# Altium PCB ADCBoard.PcbDoc (part 1 of 2)
Units mm, origin at the board's own origin, x right, y up, seen from the top; angles counter-clockwise.
Board outline 160 x 100 mm, 2 copper layers (Top Layer, Bottom Layer); 387 components, 428 nets, 1579 pads, 0 vias.
Unrouted connection lines stored in the file: 1110.
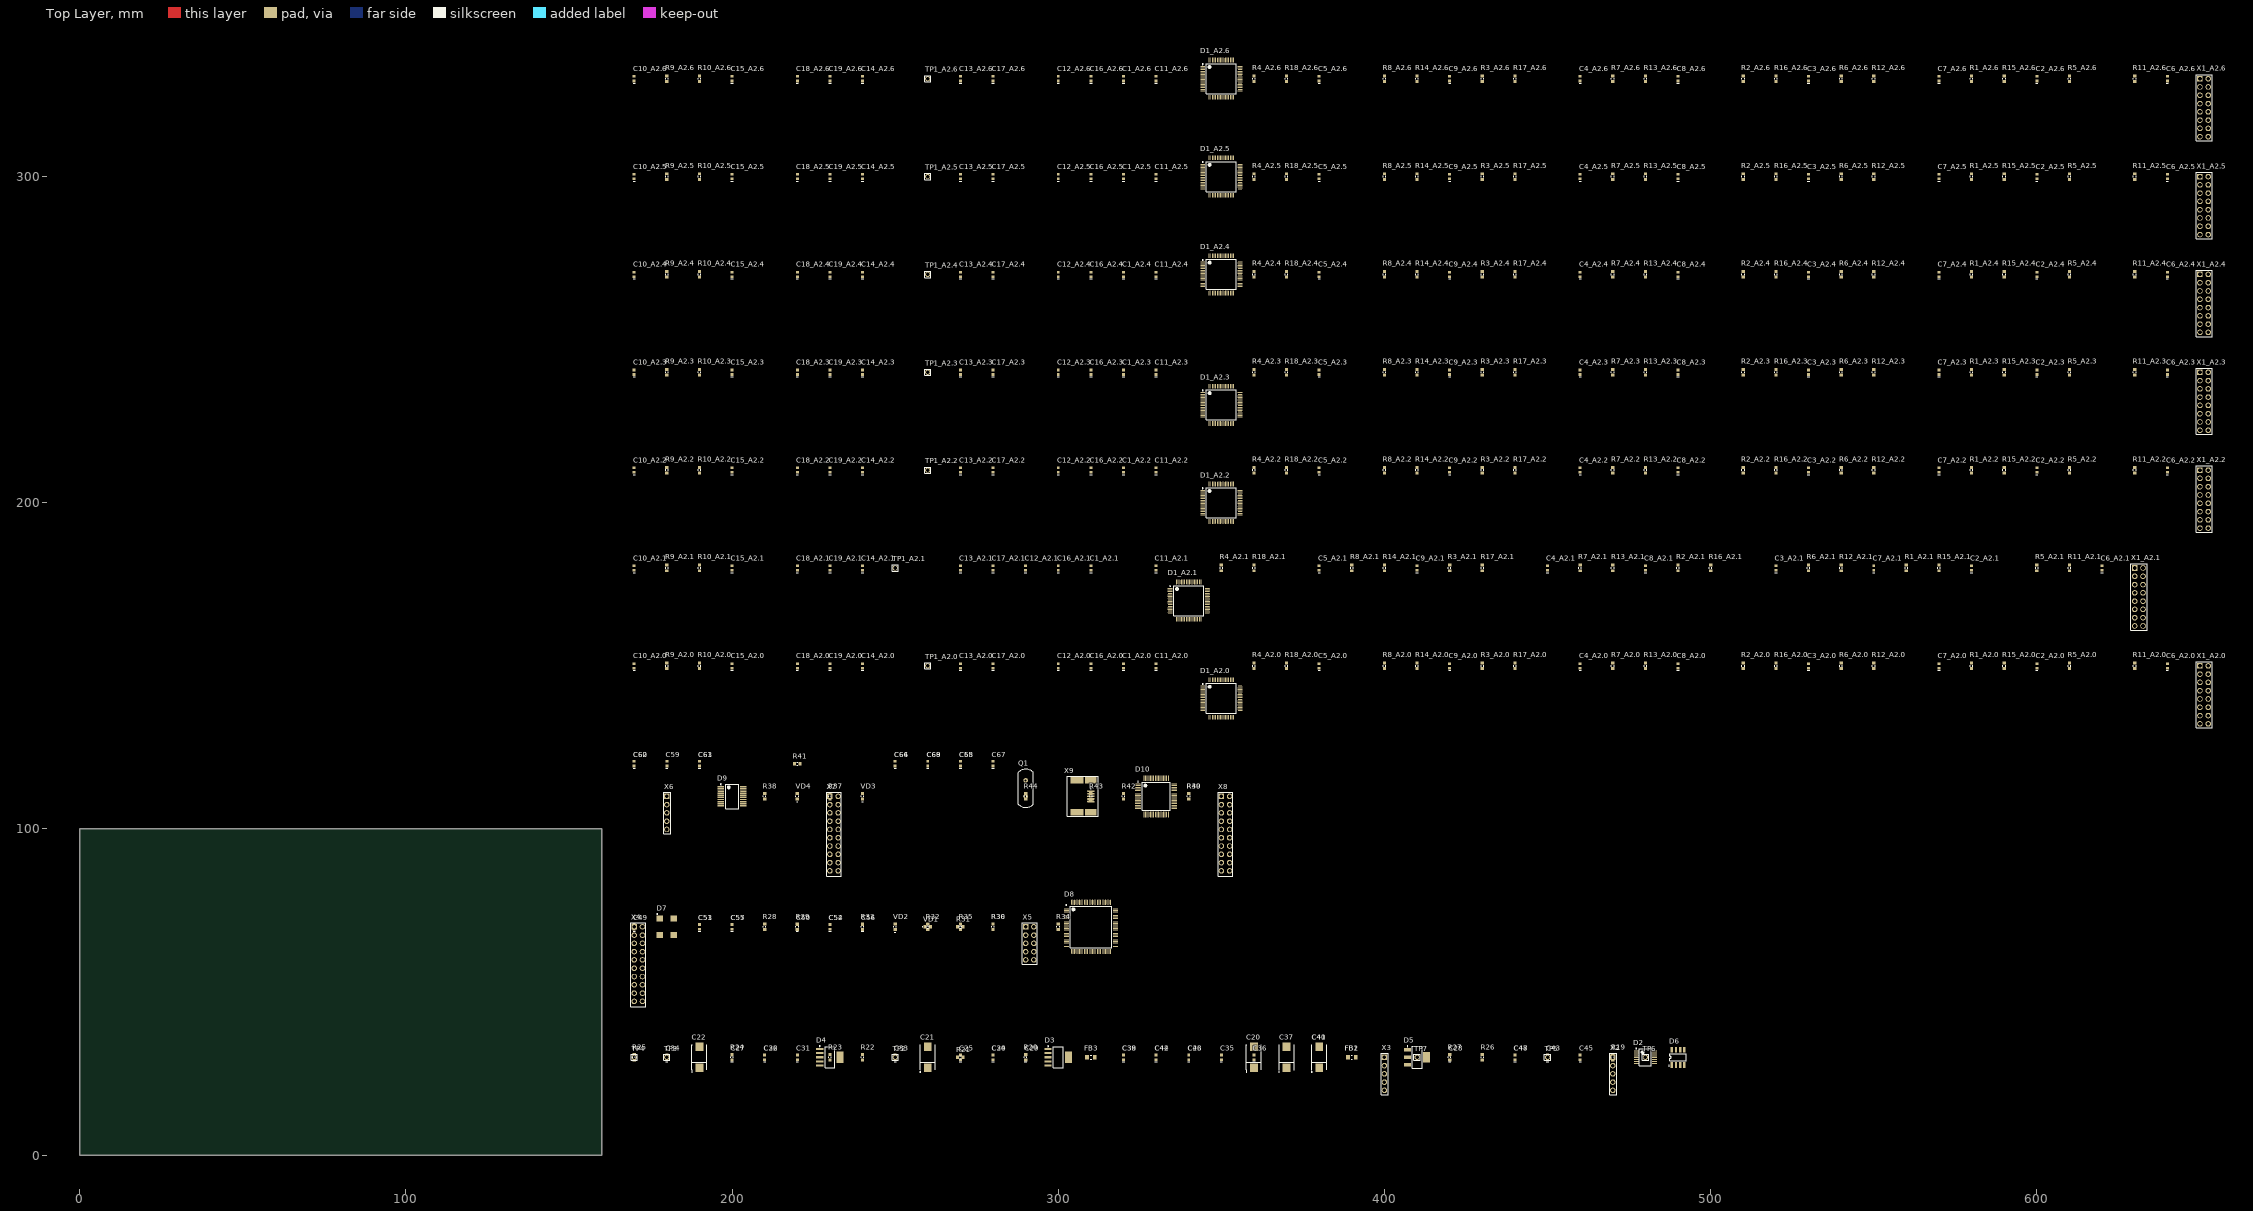
[diagram p0: Top Layer view]
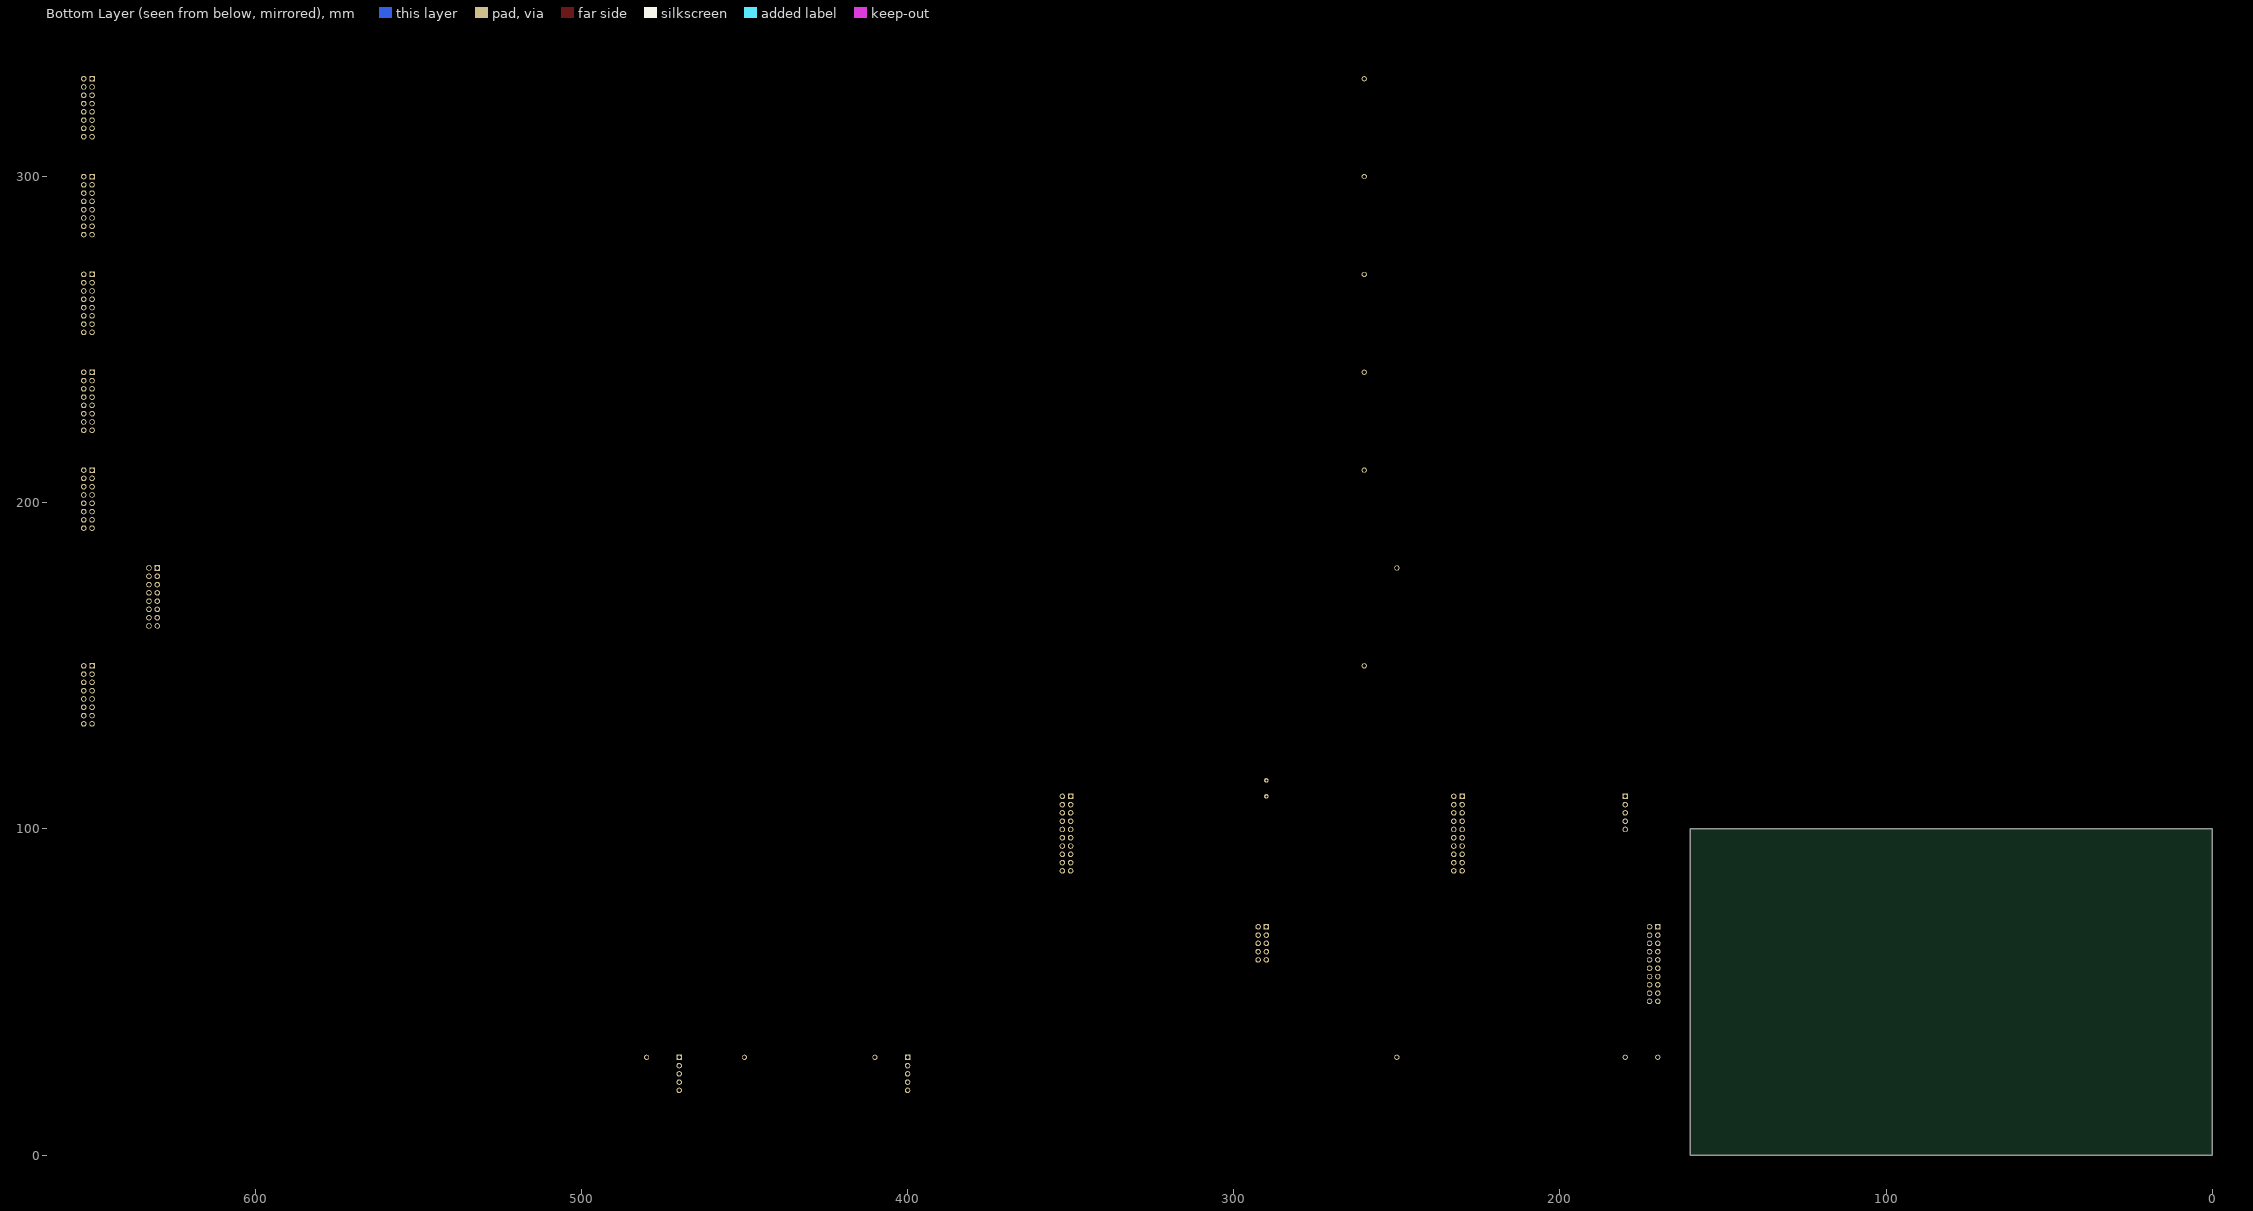
[diagram p1: Bottom Layer view, seen from below]

## Layer stack, top to bottom
Top Solder: solder mask 0.0102, Solder Resist, Dk 3.5
Top Layer: signal copper 0.0356
Dielectric 1: dielectric 0.32, FR-4, Dk 4.8
Bottom Layer: signal copper 0.0356
Bottom Solder: solder mask 0.0102, Solder Resist, Dk 3.5

## Board outline
0,0 160,0 160,100 0,100

## Design rules (kind name [scope] priority, off if disabled: settings)
Clearance [All] p1: gap=0.2
DiffPairsRouting [All] p1: maxlimit=0.254 minlimit=0.254 mostfreqgap=0.254 toplayer_minwidth=0.381 toplayer_maxwidth=0.381 toplayer_prefwidth=0.381 bottomlayer_minwidth=0.381 bottomlayer_maxwidth=0.381 bottomlayer_prefwidth=0.381 maxuncoupledlength=12.7
HoleSize [All] p1: absolutevalues=TRUE maxlimit=10 minlimit=0.3 maxpercent=80.000 minpercent=20.000
PolygonConnect [All] p1: connectstyle=Relief reliefconductorwidth=0.254 reliefentries=4 polygonreliefangle="90 Angle" airgapwidth=0.254
RoomDefinition A5 [InComponentClass('A5')] p1: confinementstyle=ConfineIn formatcopy=TRUE lockcomponents=FALSE outline 160,80 360,80 360,130 160,130
RoomDefinition A4 [InComponentClass('A4')] p2: confinementstyle=ConfineIn formatcopy=TRUE lockcomponents=FALSE outline 160,40 320,40 320,90 160,90
RoomDefinition A3 [InComponentClass('A3')] p3: confinementstyle=ConfineIn formatcopy=TRUE lockcomponents=FALSE outline 160,10 500,10 500,40 160,40
RoomDefinition A2.6 [InComponentClass('A2.6')] p4: confinementstyle=ConfineIn formatcopy=TRUE lockcomponents=FALSE outline 160,310 660,310 660,340 160,340
RoomDefinition A2.5 [InComponentClass('A2.5')] p5: confinementstyle=ConfineIn formatcopy=TRUE lockcomponents=FALSE outline 160,280 660,280 660,310 160,310
RoomDefinition A2.4 [InComponentClass('A2.4')] p6: confinementstyle=ConfineIn formatcopy=TRUE lockcomponents=FALSE outline 160,250 660,250 660,280 160,280
RoomDefinition A2.3 [InComponentClass('A2.3')] p7: confinementstyle=ConfineIn formatcopy=TRUE lockcomponents=FALSE outline 160,220 660,220 660,250 160,250
RoomDefinition A2.2 [InComponentClass('A2.2')] p8: confinementstyle=ConfineIn formatcopy=TRUE lockcomponents=FALSE outline 160,190 660,190 660,220 160,220
RoomDefinition A2.1 [InComponentClass('A2.1')] p9: confinementstyle=ConfineIn formatcopy=TRUE lockcomponents=FALSE outline 160,160 640,160 640,190 160,190
RoomDefinition A2.0 [InComponentClass('A2.0')] p10: confinementstyle=ConfineIn formatcopy=TRUE lockcomponents=FALSE outline 160,130 660,130 660,160 160,160
RoutingVias [All] p1: holewidth=0.7 width=0.3 viastyle="Through Hole" minholewidth=0.7 minwidth=0.3 maxholewidth=2 maxwidth=1.27
SolderMaskExpansion [All] p1: expansion=0.102
Width [All] p1: maxlimit=10 minlimit=0.2 preferedwidth=0.3
28 further rules are at their usual default settings.

## Classes and differential pairs
net class ANALOGIN: V1_A2.0 V1_A2.1 V1_A2.2 V1_A2.3 V1_A2.4 V1_A2.5 V1_A2.6 V1GND_A2.0 V1GND_A2.1 V1GND_A2.2 V1GND_A2.3 V1GND_A2.4 V1GND_A2.5 V1GND_A2.6 V2_A2.0 V2_A2.1 V2_A2.2 V2_A2.3 V2_A2.4 V2_A2.5 V2_A2.6 V2GND_A2.0 V2GND_A2.1 V2GND_A2.2 V2GND_A2.3 V2GND_A2.4 V2GND_A2.5 V2GND_A2.6 V3_A2.0 V3_A2.1 V3_A2.2 V3_A2.3 V3_A2.4 V3_A2.5 V3_A2.6 V3GND_A2.0 V3GND_A2.1 V3GND_A2.2 V3GND_A2.3 V3GND_A2.4 V3GND_A2.5 V3GND_A2.6 V4_A2.0 V4_A2.1 V4_A2.2 V4_A2.3 V4_A2.4 V4_A2.5 V4_A2.6 V4GND_A2.0 V4GND_A2.1 V4GND_A2.2 V4GND_A2.3 V4GND_A2.4 V4GND_A2.5 V4GND_A2.6 V5_A2.0 V5_A2.1 V5_A2.2 V5_A2.3 V5_A2.4 V5_A2.5 V5_A2.6 V5GND_A2.0 V5GND_A2.1 V5GND_A2.2 V5GND_A2.3 V5GND_A2.4 V5GND_A2.5 V5GND_A2.6 V6_A2.0 V6_A2.1 V6_A2.2 V6_A2.3 V6_A2.4 V6_A2.5 V6_A2.6 V6GND_A2.0 V6GND_A2.1 V6GND_A2.2 V6GND_A2.3 V6GND_A2.4 V6GND_A2.5 V6GND_A2.6 V7_A2.0 V7_A2.1 V7_A2.2 V7_A2.3 V7_A2.4 V7_A2.5 V7_A2.6 V7GND_A2.0 V7GND_A2.1 V7GND_A2.2 V7GND_A2.3 V7GND_A2.4 V7GND_A2.5 V7GND_A2.6 V8_A2.0 V8_A2.1 V8_A2.2 V8_A2.3 V8_A2.4 V8_A2.5 V8_A2.6 V8GND_A2.0 V8GND_A2.1 V8GND_A2.2 V8GND_A2.3 V8GND_A2.4 V8GND_A2.5 V8GND_A2.6
channel class Sheet2: U_Sheet21 U_Sheet22 U_Sheet23
component class A2.0: C1_A2.0 C2_A2.0 C3_A2.0 C4_A2.0 C5_A2.0 C6_A2.0 C7_A2.0 C8_A2.0 C9_A2.0 C10_A2.0 C11_A2.0 C12_A2.0 C13_A2.0 C14_A2.0 C15_A2.0 C16_A2.0 C17_A2.0 C18_A2.0 C19_A2.0 D1_A2.0 R1_A2.0 R2_A2.0 R3_A2.0 R4_A2.0 R5_A2.0 R6_A2.0 R7_A2.0 R8_A2.0 R9_A2.0 R10_A2.0 R11_A2.0 R12_A2.0 R13_A2.0 R14_A2.0 R15_A2.0 R16_A2.0 R17_A2.0 R18_A2.0 TP1_A2.0 X1_A2.0
component class A2.1: C1_A2.1 C2_A2.1 C3_A2.1 C4_A2.1 C5_A2.1 C6_A2.1 C7_A2.1 C8_A2.1 C9_A2.1 C10_A2.1 C11_A2.1 C12_A2.1 C13_A2.1 C14_A2.1 C15_A2.1 C16_A2.1 C17_A2.1 C18_A2.1 C19_A2.1 D1_A2.1 R1_A2.1 R2_A2.1 R3_A2.1 R4_A2.1 R5_A2.1 R6_A2.1 R7_A2.1 R8_A2.1 R9_A2.1 R10_A2.1 R11_A2.1 R12_A2.1 R13_A2.1 R14_A2.1 R15_A2.1 R16_A2.1 R17_A2.1 R18_A2.1 TP1_A2.1 X1_A2.1
component class A2.2: C1_A2.2 C2_A2.2 C3_A2.2 C4_A2.2 C5_A2.2 C6_A2.2 C7_A2.2 C8_A2.2 C9_A2.2 C10_A2.2 C11_A2.2 C12_A2.2 C13_A2.2 C14_A2.2 C15_A2.2 C16_A2.2 C17_A2.2 C18_A2.2 C19_A2.2 D1_A2.2 R1_A2.2 R2_A2.2 R3_A2.2 R4_A2.2 R5_A2.2 R6_A2.2 R7_A2.2 R8_A2.2 R9_A2.2 R10_A2.2 R11_A2.2 R12_A2.2 R13_A2.2 R14_A2.2 R15_A2.2 R16_A2.2 R17_A2.2 R18_A2.2 TP1_A2.2 X1_A2.2
component class A2.3: C1_A2.3 C2_A2.3 C3_A2.3 C4_A2.3 C5_A2.3 C6_A2.3 C7_A2.3 C8_A2.3 C9_A2.3 C10_A2.3 C11_A2.3 C12_A2.3 C13_A2.3 C14_A2.3 C15_A2.3 C16_A2.3 C17_A2.3 C18_A2.3 C19_A2.3 D1_A2.3 R1_A2.3 R2_A2.3 R3_A2.3 R4_A2.3 R5_A2.3 R6_A2.3 R7_A2.3 R8_A2.3 R9_A2.3 R10_A2.3 R11_A2.3 R12_A2.3 R13_A2.3 R14_A2.3 R15_A2.3 R16_A2.3 R17_A2.3 R18_A2.3 TP1_A2.3 X1_A2.3
component class A2.4: C1_A2.4 C2_A2.4 C3_A2.4 C4_A2.4 C5_A2.4 C6_A2.4 C7_A2.4 C8_A2.4 C9_A2.4 C10_A2.4 C11_A2.4 C12_A2.4 C13_A2.4 C14_A2.4 C15_A2.4 C16_A2.4 C17_A2.4 C18_A2.4 C19_A2.4 D1_A2.4 R1_A2.4 R2_A2.4 R3_A2.4 R4_A2.4 R5_A2.4 R6_A2.4 R7_A2.4 R8_A2.4 R9_A2.4 R10_A2.4 R11_A2.4 R12_A2.4 R13_A2.4 R14_A2.4 R15_A2.4 R16_A2.4 R17_A2.4 R18_A2.4 TP1_A2.4 X1_A2.4
component class A2.5: C1_A2.5 C2_A2.5 C3_A2.5 C4_A2.5 C5_A2.5 C6_A2.5 C7_A2.5 C8_A2.5 C9_A2.5 C10_A2.5 C11_A2.5 C12_A2.5 C13_A2.5 C14_A2.5 C15_A2.5 C16_A2.5 C17_A2.5 C18_A2.5 C19_A2.5 D1_A2.5 R1_A2.5 R2_A2.5 R3_A2.5 R4_A2.5 R5_A2.5 R6_A2.5 R7_A2.5 R8_A2.5 R9_A2.5 R10_A2.5 R11_A2.5 R12_A2.5 R13_A2.5 R14_A2.5 R15_A2.5 R16_A2.5 R17_A2.5 R18_A2.5 TP1_A2.5 X1_A2.5
component class A2.6: C1_A2.6 C2_A2.6 C3_A2.6 C4_A2.6 C5_A2.6 C6_A2.6 C7_A2.6 C8_A2.6 C9_A2.6 C10_A2.6 C11_A2.6 C12_A2.6 C13_A2.6 C14_A2.6 C15_A2.6 C16_A2.6 C17_A2.6 C18_A2.6 C19_A2.6 D1_A2.6 R1_A2.6 R2_A2.6 R3_A2.6 R4_A2.6 R5_A2.6 R6_A2.6 R7_A2.6 R8_A2.6 R9_A2.6 R10_A2.6 R11_A2.6 R12_A2.6 R13_A2.6 R14_A2.6 R15_A2.6 R16_A2.6 R17_A2.6 R18_A2.6 TP1_A2.6 X1_A2.6
component class A3: C20 C21 C22 C23 C24 C25 C26 C27 C28 C29 C30 C31 C32 C33 C34 C35 C36 C37 C38 C39 C40 C41 C42 C43 C44 C45 C46 C47 C48 D2 D3 D4 D5 D6 FB1 FB2 FB3 R19 R20 R21 R22 R23 R24 R25 R26 R27 TP2 TP3 TP4 TP5 TP6 TP7 X2 X3
component class A4: C49 C50 C51 C52 C53 C54 C55 C56 C57 D7 D8 R28 R29 R30 R31 R32 R33 R34 R35 R36 VD1 VD2 X4 X5
component class A5: C58 C59 C60 C61 C62 C63 C64 C65 C66 C67 C68 C69 D9 D10 Q1 R37 R38 R39 R40 R41 R42 R43 R44 VD3 VD4 X6 X7 X8 X9
net class BUSY[6..0]: BUSY0 BUSY1 BUSY2 BUSY3 BUSY4 BUSY5 BUSY6
net class CS[6..0]: CS0 CS1 CS2 CS3 CS4 CS5 CS6
net class DATA[15..0]: DATA0 DATA1 DATA2 DATA3 DATA4 DATA5 DATA6 DATA7 DATA8 DATA9 DATA10 DATA11 DATA12 DATA13 DATA14 DATA15
net class FRSTDATA[6..0]: FRSTDATA0 FRSTDATA1 FRSTDATA2 FRSTDATA3 FRSTDATA4 FRSTDATA5 FRSTDATA6
net class OS[2..0]: OS0 OS1 OS2
differential pair USB: +USB_P -USB_N

## Components (designator, comment, footprint, x,y, rotation, side; value= is the part's Value field where it differs from the comment)
C1_A2.0 "0.1 uF" CAPC1608N 320,150 r90 top (schematic designator C1)
C1_A2.1 "0.1 uF" CAPC1608N 310,180 r90 top (schematic designator C1)
C1_A2.2 "0.1 uF" CAPC1608N 320,210 r90 top (schematic designator C1)
C1_A2.3 "0.1 uF" CAPC1608N 320,240 r90 top (schematic designator C1)
C1_A2.4 "0.1 uF" CAPC1608N 320,270 r90 top (schematic designator C1)
C1_A2.5 "0.1 uF" CAPC1608N 320,300 r90 top (schematic designator C1)
C1_A2.6 "0.1 uF" CAPC1608N 320,330 r90 top (schematic designator C1)
C2_A2.0 "560 pF" CAPC1608N 600,150 r90 top (schematic designator C2)
C2_A2.1 "560 pF" CAPC1608N 580,180 r90 top (schematic designator C2)
C2_A2.2 "560 pF" CAPC1608N 600,210 r90 top (schematic designator C2)
C2_A2.3 "560 pF" CAPC1608N 600,240 r90 top (schematic designator C2)
C2_A2.4 "560 pF" CAPC1608N 600,270 r90 top (schematic designator C2)
C2_A2.5 "560 pF" CAPC1608N 600,300 r90 top (schematic designator C2)
C2_A2.6 "560 pF" CAPC1608N 600,330 r90 top (schematic designator C2)
C3_A2.0 "560 pF" CAPC1608N 530,150 r90 top (schematic designator C3)
C3_A2.1 "560 pF" CAPC1608N 520,180 r90 top (schematic designator C3)
C3_A2.2 "560 pF" CAPC1608N 530,210 r90 top (schematic designator C3)
C3_A2.3 "560 pF" CAPC1608N 530,240 r90 top (schematic designator C3)
C3_A2.4 "560 pF" CAPC1608N 530,270 r90 top (schematic designator C3)
C3_A2.5 "560 pF" CAPC1608N 530,300 r90 top (schematic designator C3)
C3_A2.6 "560 pF" CAPC1608N 530,330 r90 top (schematic designator C3)
C4_A2.0 "560 pF" CAPC1608N 460,150 r90 top (schematic designator C4)
C4_A2.1 "560 pF" CAPC1608N 450,180 r90 top (schematic designator C4)
C4_A2.2 "560 pF" CAPC1608N 460,210 r90 top (schematic designator C4)
C4_A2.3 "560 pF" CAPC1608N 460,240 r90 top (schematic designator C4)
C4_A2.4 "560 pF" CAPC1608N 460,270 r90 top (schematic designator C4)
C4_A2.5 "560 pF" CAPC1608N 460,300 r90 top (schematic designator C4)
C4_A2.6 "560 pF" CAPC1608N 460,330 r90 top (schematic designator C4)
C5_A2.0 "560 pF" CAPC1608N 380,150 r90 top (schematic designator C5)
C5_A2.1 "560 pF" CAPC1608N 380,180 r90 top (schematic designator C5)
C5_A2.2 "560 pF" CAPC1608N 380,210 r90 top (schematic designator C5)
C5_A2.3 "560 pF" CAPC1608N 380,240 r90 top (schematic designator C5)
C5_A2.4 "560 pF" CAPC1608N 380,270 r90 top (schematic designator C5)
C5_A2.5 "560 pF" CAPC1608N 380,300 r90 top (schematic designator C5)
C5_A2.6 "560 pF" CAPC1608N 380,330 r90 top (schematic designator C5)
C6_A2.0 "560 pF" CAPC1608N 640,150 r90 top (schematic designator C6)
C6_A2.1 "560 pF" CAPC1608N 620,180 r90 top (schematic designator C6)
C6_A2.2 "560 pF" CAPC1608N 640,210 r90 top (schematic designator C6)
C6_A2.3 "560 pF" CAPC1608N 640,240 r90 top (schematic designator C6)
C6_A2.4 "560 pF" CAPC1608N 640,270 r90 top (schematic designator C6)
C6_A2.5 "560 pF" CAPC1608N 640,300 r90 top (schematic designator C6)
C6_A2.6 "560 pF" CAPC1608N 640,330 r90 top (schematic designator C6)
C7_A2.0 "560 pF" CAPC1608N 570,150 r90 top (schematic designator C7)
C7_A2.1 "560 pF" CAPC1608N 550,180 r90 top (schematic designator C7)
C7_A2.2 "560 pF" CAPC1608N 570,210 r90 top (schematic designator C7)
C7_A2.3 "560 pF" CAPC1608N 570,240 r90 top (schematic designator C7)
C7_A2.4 "560 pF" CAPC1608N 570,270 r90 top (schematic designator C7)
C7_A2.5 "560 pF" CAPC1608N 570,300 r90 top (schematic designator C7)
C7_A2.6 "560 pF" CAPC1608N 570,330 r90 top (schematic designator C7)
C8_A2.0 "560 pF" CAPC1608N 490,150 r90 top (schematic designator C8)
C8_A2.1 "560 pF" CAPC1608N 480,180 r90 top (schematic designator C8)
C8_A2.2 "560 pF" CAPC1608N 490,210 r90 top (schematic designator C8)
C8_A2.3 "560 pF" CAPC1608N 490,240 r90 top (schematic designator C8)
C8_A2.4 "560 pF" CAPC1608N 490,270 r90 top (schematic designator C8)
C8_A2.5 "560 pF" CAPC1608N 490,300 r90 top (schematic designator C8)
C8_A2.6 "560 pF" CAPC1608N 490,330 r90 top (schematic designator C8)
C9_A2.0 "560 pF" CAPC1608N 420,150 r90 top (schematic designator C9)
C9_A2.1 "560 pF" CAPC1608N 410,180 r90 top (schematic designator C9)
C9_A2.2 "560 pF" CAPC1608N 420,210 r90 top (schematic designator C9)
C9_A2.3 "560 pF" CAPC1608N 420,240 r90 top (schematic designator C9)
C9_A2.4 "560 pF" CAPC1608N 420,270 r90 top (schematic designator C9)
C9_A2.5 "560 pF" CAPC1608N 420,300 r90 top (schematic designator C9)
C9_A2.6 "560 pF" CAPC1608N 420,330 r90 top (schematic designator C9)
C10_A2.0 "0.1 uF" CAPC1608N 170,150 r90 top (schematic designator C10)
C10_A2.1 "0.1 uF" CAPC1608N 170,180 r90 top (schematic designator C10)
C10_A2.2 "0.1 uF" CAPC1608N 170,210 r90 top (schematic designator C10)
C10_A2.3 "0.1 uF" CAPC1608N 170,240 r90 top (schematic designator C10)
C10_A2.4 "0.1 uF" CAPC1608N 170,270 r90 top (schematic designator C10)
C10_A2.5 "0.1 uF" CAPC1608N 170,300 r90 top (schematic designator C10)
C10_A2.6 "0.1 uF" CAPC1608N 170,330 r90 top (schematic designator C10)
C11_A2.0 "0.1 uF" CAPC1608N 330,150 r90 top (schematic designator C11)
C11_A2.1 "0.1 uF" CAPC1608N 330,180 r90 top (schematic designator C11)
C11_A2.2 "0.1 uF" CAPC1608N 330,210 r90 top (schematic designator C11)
C11_A2.3 "0.1 uF" CAPC1608N 330,240 r90 top (schematic designator C11)
C11_A2.4 "0.1 uF" CAPC1608N 330,270 r90 top (schematic designator C11)
C11_A2.5 "0.1 uF" CAPC1608N 330,300 r90 top (schematic designator C11)
C11_A2.6 "0.1 uF" CAPC1608N 330,330 r90 top (schematic designator C11)
C12_A2.0 "10 uF" CAPC1608N 300,150 r90 top (schematic designator C12)
C12_A2.1 "10 uF" CAPC1608N 290,180 r90 top (schematic designator C12)
C12_A2.2 "10 uF" CAPC1608N 300,210 r90 top (schematic designator C12)
C12_A2.3 "10 uF" CAPC1608N 300,240 r90 top (schematic designator C12)
C12_A2.4 "10 uF" CAPC1608N 300,270 r90 top (schematic designator C12)
C12_A2.5 "10 uF" CAPC1608N 300,300 r90 top (schematic designator C12)
C12_A2.6 "10 uF" CAPC1608N 300,330 r90 top (schematic designator C12)
C13_A2.0 "0.1 uF" CAPC1608N 270,150 r90 top (schematic designator C13)
C13_A2.1 "0.1 uF" CAPC1608N 270,180 r90 top (schematic designator C13)
C13_A2.2 "0.1 uF" CAPC1608N 270,210 r90 top (schematic designator C13)
C13_A2.3 "0.1 uF" CAPC1608N 270,240 r90 top (schematic designator C13)
C13_A2.4 "0.1 uF" CAPC1608N 270,270 r90 top (schematic designator C13)
C13_A2.5 "0.1 uF" CAPC1608N 270,300 r90 top (schematic designator C13)
C13_A2.6 "0.1 uF" CAPC1608N 270,330 r90 top (schematic designator C13)
C14_A2.0 "1 uF" CAPC1608N 240,150 r90 top (schematic designator C14)
C14_A2.1 "1 uF" CAPC1608N 240,180 r90 top (schematic designator C14)
C14_A2.2 "1 uF" CAPC1608N 240,210 r90 top (schematic designator C14)
C14_A2.3 "1 uF" CAPC1608N 240,240 r90 top (schematic designator C14)
C14_A2.4 "1 uF" CAPC1608N 240,270 r90 top (schematic designator C14)
C14_A2.5 "1 uF" CAPC1608N 240,300 r90 top (schematic designator C14)
C14_A2.6 "1 uF" CAPC1608N 240,330 r90 top (schematic designator C14)
C15_A2.0 "1 uF" CAPC1608N 200,150 r90 top (schematic designator C15)
C15_A2.1 "1 uF" CAPC1608N 200,180 r90 top (schematic designator C15)
C15_A2.2 "1 uF" CAPC1608N 200,210 r90 top (schematic designator C15)
C15_A2.3 "1 uF" CAPC1608N 200,240 r90 top (schematic designator C15)
C15_A2.4 "1 uF" CAPC1608N 200,270 r90 top (schematic designator C15)
C15_A2.5 "1 uF" CAPC1608N 200,300 r90 top (schematic designator C15)
C15_A2.6 "1 uF" CAPC1608N 200,330 r90 top (schematic designator C15)
C16_A2.0 "10 uF" CAPC1608N 310,150 r90 top (schematic designator C16)
C16_A2.1 "10 uF" CAPC1608N 300,180 r90 top (schematic designator C16)
C16_A2.2 "10 uF" CAPC1608N 310,210 r90 top (schematic designator C16)
C16_A2.3 "10 uF" CAPC1608N 310,240 r90 top (schematic designator C16)
C16_A2.4 "10 uF" CAPC1608N 310,270 r90 top (schematic designator C16)
C16_A2.5 "10 uF" CAPC1608N 310,300 r90 top (schematic designator C16)
C16_A2.6 "10 uF" CAPC1608N 310,330 r90 top (schematic designator C16)
C17_A2.0 "2.2 uF" CAPC1608N 280,150 r90 top (schematic designator C17)
C17_A2.1 "2.2 uF" CAPC1608N 280,180 r90 top (schematic designator C17)
C17_A2.2 "2.2 uF" CAPC1608N 280,210 r90 top (schematic designator C17)
C17_A2.3 "2.2 uF" CAPC1608N 280,240 r90 top (schematic designator C17)
C17_A2.4 "2.2 uF" CAPC1608N 280,270 r90 top (schematic designator C17)
C17_A2.5 "2.2 uF" CAPC1608N 280,300 r90 top (schematic designator C17)
C17_A2.6 "2.2 uF" CAPC1608N 280,330 r90 top (schematic designator C17)
C18_A2.0 "0.1 uF" CAPC1608N 220,150 r90 top (schematic designator C18)
C18_A2.1 "0.1 uF" CAPC1608N 220,180 r90 top (schematic designator C18)
C18_A2.2 "0.1 uF" CAPC1608N 220,210 r90 top (schematic designator C18)
C18_A2.3 "0.1 uF" CAPC1608N 220,240 r90 top (schematic designator C18)
C18_A2.4 "0.1 uF" CAPC1608N 220,270 r90 top (schematic designator C18)
C18_A2.5 "0.1 uF" CAPC1608N 220,300 r90 top (schematic designator C18)
C18_A2.6 "0.1 uF" CAPC1608N 220,330 r90 top (schematic designator C18)
C19_A2.0 "0.1 uF" CAPC1608N 230,150 r90 top (schematic designator C19)
C19_A2.1 "0.1 uF" CAPC1608N 230,180 r90 top (schematic designator C19)
C19_A2.2 "0.1 uF" CAPC1608N 230,210 r90 top (schematic designator C19)
C19_A2.3 "0.1 uF" CAPC1608N 230,240 r90 top (schematic designator C19)
C19_A2.4 "0.1 uF" CAPC1608N 230,270 r90 top (schematic designator C19)
C19_A2.5 "0.1 uF" CAPC1608N 230,300 r90 top (schematic designator C19)
C19_A2.6 "0.1 uF" CAPC1608N 230,330 r90 top (schematic designator C19)
C20 "100uF" TC7343-2917 360,30 r90 top
C21 "220uF" TC7343-2917 260,30 r90 top
C22 "220uF" TC7343-2917 190,30 r90 top
C23 "0.1 uF" CAPC1608N 340,30 r90 top
C24 "0.1 uF" CAPC1608N 280,30 r90 top
C25 "0.1 uF" CAPC1608N 270,30 r90 top
C26 "0.1 uF" CAPC1608N 210,30 r90 top
C27 "0.1 uF" CAPC1608N 200,30 r90 top
C28 "0.1 uF" CAPC1608N 420,30 r90 top
C29 "2.2 uF" CAPC1608N 290,30 r90 top
C30 "2.2 uF" CAPC1608N 280,30 r90 top
C31 "2.2 uF" CAPC1608N 220,30 r90 top
C32 "2.2 uF" CAPC1608N 210,30 r90 top
C33 "0.1 uF no pop" CAPC1608N 250,30 r90 top
C34 "0.1 uF no pop" CAPC1608N 180,30 r90 top
C35 "0.1 uF" CAPC1608N 350,30 r90 top
C36 "0.1 uF" CAPC1608N 360,30 r90 top
C37 "100uF" TC7343-2917 370,30 r90 top
C38 "0.1 uF" CAPC1608N 320,30 r90 top
C39 "0.1 uF" CAPC1608N 320,30 r90 top
C40 "220uF" TC7343-2917 380,30 r90 top
C41 "220uF" TC7343-2917 380,30 r90 top
C42 "0.1 uF" CAPC1608N 330,30 r90 top
C43 "0.1 uF" CAPC1608N 450,30 r90 top
C44 "0.1 uF" CAPC1608N 330,30 r90 top
C45 "2.2 uF" CAPC1608N 460,30 r90 top
C46 "560 pF" CAPC1608N 340,30 r90 top
C47 "2.2 uF" CAPC1608N 440,30 r90 top
C48 "0.1 uF" CAPC1608N 440,30 r90 top
C49 "0.1 uF" CAPC1608N 170,70 r90 top
C50 "0.1 uF" CAPC1608N 220,70 r90 top
C51 "0.1 uF" CAPC1608N 190,70 r90 top
C52 "0.1 uF" CAPC1608N 230,70 r90 top
C53 "0.1 uF" CAPC1608N 190,70 r90 top
C54 "0.1 uF" CAPC1608N 230,70 r90 top
C55 "0.1 uF" CAPC1608N 200,70 r90 top
C56 "0.1 uF" CAPC1608N 240,70 r90 top
C57 "0.1 uF" CAPC1608N 200,70 r90 top
C58 "0.1 uF" CAPC1608N 270,120 r90 top
C59 "0.1 uF" CAPC1608N 180,120 r90 top
C60 "0.1 uF" CAPC1608N 170,120 r90 top
C61 "0.1 uF" CAPC1608N 190,120 r90 top
C62 "0.1 uF" CAPC1608N 170,120 r90 top
C63 "0.1 uF" CAPC1608N 190,120 r90 top
C64 "0.1 uF" CAPC1608N 250,120 r90 top
C65 "47 pF" CAPC1608N 270,120 r90 top
C66 "0.1 uF" CAPC1608N 250,120 r90 top
C67 "47 pF" CAPC1608N 280,120 r90 top
C68 "0.1 uF" CAPC1608N 260,120 r90 top
C69 "0.1 uF" CAPC1608N 260,120 r90 top
D1_A2.0 "AD7607BSTZ" TSQFP50P1200X1200X160-64N 350,140 r0 top (schematic designator D1)
D1_A2.1 "AD7607BSTZ" TSQFP50P1200X1200X160-64N 340,170 r0 top (schematic designator D1)
D1_A2.2 "AD7607BSTZ" TSQFP50P1200X1200X160-64N 350,200 r0 top (schematic designator D1)
D1_A2.3 "AD7607BSTZ" TSQFP50P1200X1200X160-64N 350,230 r0 top (schematic designator D1)
D1_A2.4 "AD7607BSTZ" TSQFP50P1200X1200X160-64N 350,270 r0 top (schematic designator D1)
D1_A2.5 "AD7607BSTZ" TSQFP50P1200X1200X160-64N 350,300 r0 top (schematic designator D1)
D1_A2.6 "AD7607BSTZ" TSQFP50P1200X1200X160-64N 350,330 r0 top (schematic designator D1)
D2 "SN74LV4T125PWR" TSOP65P640X120-14N 480,30 r0 top
D3 "TPS79618DCQ" SOT127P706X180-6N 300,30 r0 top
D4 "TPS79633DCQ" SOT127P706X180-6N 230,30 r0 top
D5 "LM2940IMP-5.0/NOPB" SOT230P700X180-4N 410,30 r0 top
D6 "REF5040IDR" SO8 490,30 r0 top
D7 "KXO-V97 14.7456 MHz" KXO-V97 180,70 r0 top
D8 "5M570ZT100I5" TQFP100_A-120_L 310,70 r0 top
D9 "MAX3222ECDB" SOP65P780X200-20N 200,110 r0 top
D10 "STM32F103RF" LQFP64 330,110 r0 top
FB1 "BLM21PG221SN" INDC2009M 390,30 r0 top
FB2 "BLM21PG221SN" INDC2009M 390,30 r0 top
FB3 "BLM21PG221SN" INDC2009M 310,30 r0 top
Q1 "Quarz" HC-49/U3H 290,110 r90 top
R1_A2.0 "1 kOhm" RESC1608N 580,150 r90 top (schematic designator R1)
R1_A2.1 "1 kOhm" RESC1608N 560,180 r90 top (schematic designator R1)
R1_A2.2 "1 kOhm" RESC1608N 580,210 r90 top (schematic designator R1)
R1_A2.3 "1 kOhm" RESC1608N 580,240 r90 top (schematic designator R1)
R1_A2.4 "1 kOhm" RESC1608N 580,270 r90 top (schematic designator R1)
R1_A2.5 "1 kOhm" RESC1608N 580,300 r90 top (schematic designator R1)
R1_A2.6 "1 kOhm" RESC1608N 580,330 r90 top (schematic designator R1)
R2_A2.0 "1 kOhm" RESC1608N 510,150 r90 top (schematic designator R2)
R2_A2.1 "1 kOhm" RESC1608N 490,180 r90 top (schematic designator R2)
R2_A2.2 "1 kOhm" RESC1608N 510,210 r90 top (schematic designator R2)
R2_A2.3 "1 kOhm" RESC1608N 510,240 r90 top (schematic designator R2)
R2_A2.4 "1 kOhm" RESC1608N 510,270 r90 top (schematic designator R2)
R2_A2.5 "1 kOhm" RESC1608N 510,300 r90 top (schematic designator R2)
R2_A2.6 "1 kOhm" RESC1608N 510,330 r90 top (schematic designator R2)
R3_A2.0 "1 kOhm" RESC1608N 430,150 r90 top (schematic designator R3)
R3_A2.1 "1 kOhm" RESC1608N 420,180 r90 top (schematic designator R3)
R3_A2.2 "1 kOhm" RESC1608N 430,210 r90 top (schematic designator R3)
R3_A2.3 "1 kOhm" RESC1608N 430,240 r90 top (schematic designator R3)
R3_A2.4 "1 kOhm" RESC1608N 430,270 r90 top (schematic designator R3)
R3_A2.5 "1 kOhm" RESC1608N 430,300 r90 top (schematic designator R3)
R3_A2.6 "1 kOhm" RESC1608N 430,330 r90 top (schematic designator R3)
R4_A2.0 "1 kOhm" RESC1608N 360,150 r90 top (schematic designator R4)
R4_A2.1 "1 kOhm" RESC1608N 350,180 r90 top (schematic designator R4)
R4_A2.2 "1 kOhm" RESC1608N 360,210 r90 top (schematic designator R4)
R4_A2.3 "1 kOhm" RESC1608N 360,240 r90 top (schematic designator R4)
R4_A2.4 "1 kOhm" RESC1608N 360,270 r90 top (schematic designator R4)
R4_A2.5 "1 kOhm" RESC1608N 360,300 r90 top (schematic designator R4)
R4_A2.6 "1 kOhm" RESC1608N 360,330 r90 top (schematic designator R4)
R5_A2.0 "1 kOhm" RESC1608N 610,150 r90 top (schematic designator R5)
R5_A2.1 "1 kOhm" RESC1608N 600,180 r90 top (schematic designator R5)
R5_A2.2 "1 kOhm" RESC1608N 610,210 r90 top (schematic designator R5)
R5_A2.3 "1 kOhm" RESC1608N 610,240 r90 top (schematic designator R5)
R5_A2.4 "1 kOhm" RESC1608N 610,270 r90 top (schematic designator R5)
R5_A2.5 "1 kOhm" RESC1608N 610,300 r90 top (schematic designator R5)
R5_A2.6 "1 kOhm" RESC1608N 610,330 r90 top (schematic designator R5)
R6_A2.0 "1 kOhm" RESC1608N 540,150 r90 top (schematic designator R6)
R6_A2.1 "1 kOhm" RESC1608N 530,180 r90 top (schematic designator R6)
R6_A2.2 "1 kOhm" RESC1608N 540,210 r90 top (schematic designator R6)
R6_A2.3 "1 kOhm" RESC1608N 540,240 r90 top (schematic designator R6)
R6_A2.4 "1 kOhm" RESC1608N 540,270 r90 top (schematic designator R6)
R6_A2.5 "1 kOhm" RESC1608N 540,300 r90 top (schematic designator R6)
R6_A2.6 "1 kOhm" RESC1608N 540,330 r90 top (schematic designator R6)
R7_A2.0 "1 kOhm" RESC1608N 470,150 r90 top (schematic designator R7)
R7_A2.1 "1 kOhm" RESC1608N 460,180 r90 top (schematic designator R7)
R7_A2.2 "1 kOhm" RESC1608N 470,210 r90 top (schematic designator R7)
R7_A2.3 "1 kOhm" RESC1608N 470,240 r90 top (schematic designator R7)
R7_A2.4 "1 kOhm" RESC1608N 470,270 r90 top (schematic designator R7)
R7_A2.5 "1 kOhm" RESC1608N 470,300 r90 top (schematic designator R7)
R7_A2.6 "1 kOhm" RESC1608N 470,330 r90 top (schematic designator R7)
R8_A2.0 "1 kOhm" RESC1608N 400,150 r90 top (schematic designator R8)
R8_A2.1 "1 kOhm" RESC1608N 390,180 r90 top (schematic designator R8)
R8_A2.2 "1 kOhm" RESC1608N 400,210 r90 top (schematic designator R8)
R8_A2.3 "1 kOhm" RESC1608N 400,240 r90 top (schematic designator R8)
R8_A2.4 "1 kOhm" RESC1608N 400,270 r90 top (schematic designator R8)
R8_A2.5 "1 kOhm" RESC1608N 400,300 r90 top (schematic designator R8)
R8_A2.6 "1 kOhm" RESC1608N 400,330 r90 top (schematic designator R8)
R9_A2.0 "47 kOhm" RESC1608N 180,150 r90 top (schematic designator R9)
R9_A2.1 "47 kOhm" RESC1608N 180,180 r90 top (schematic designator R9)
R9_A2.2 "47 kOhm" RESC1608N 180,210 r90 top (schematic designator R9)
R9_A2.3 "47 kOhm" RESC1608N 180,240 r90 top (schematic designator R9)
R9_A2.4 "47 kOhm" RESC1608N 180,270 r90 top (schematic designator R9)
R9_A2.5 "47 kOhm" RESC1608N 180,300 r90 top (schematic designator R9)
R9_A2.6 "47 kOhm" RESC1608N 180,330 r90 top (schematic designator R9)
R10_A2.0 "47 kOhm no pop" RESC1608N 190,150 r90 top (schematic designator R10)
R10_A2.1 "47 kOhm no pop" RESC1608N 190,180 r90 top (schematic designator R10)
R10_A2.2 "47 kOhm no pop" RESC1608N 190,210 r90 top (schematic designator R10)
R10_A2.3 "47 kOhm no pop" RESC1608N 190,240 r90 top (schematic designator R10)
R10_A2.4 "47 kOhm no pop" RESC1608N 190,270 r90 top (schematic designator R10)
R10_A2.5 "47 kOhm no pop" RESC1608N 190,300 r90 top (schematic designator R10)
R10_A2.6 "47 kOhm no pop" RESC1608N 190,330 r90 top (schematic designator R10)
R11_A2.0 "1 kOhm" RESC1608N 630,150 r90 top (schematic designator R11)
R11_A2.1 "1 kOhm" RESC1608N 610,180 r90 top (schematic designator R11)
R11_A2.2 "1 kOhm" RESC1608N 630,210 r90 top (schematic designator R11)
R11_A2.3 "1 kOhm" RESC1608N 630,240 r90 top (schematic designator R11)
R11_A2.4 "1 kOhm" RESC1608N 630,270 r90 top (schematic designator R11)
R11_A2.5 "1 kOhm" RESC1608N 630,300 r90 top (schematic designator R11)
R11_A2.6 "1 kOhm" RESC1608N 630,330 r90 top (schematic designator R11)
R12_A2.0 "1 kOhm" RESC1608N 550,150 r90 top (schematic designator R12)
R12_A2.1 "1 kOhm" RESC1608N 540,180 r90 top (schematic designator R12)
R12_A2.2 "1 kOhm" RESC1608N 550,210 r90 top (schematic designator R12)
R12_A2.3 "1 kOhm" RESC1608N 550,240 r90 top (schematic designator R12)
R12_A2.4 "1 kOhm" RESC1608N 550,270 r90 top (schematic designator R12)
R12_A2.5 "1 kOhm" RESC1608N 550,300 r90 top (schematic designator R12)
R12_A2.6 "1 kOhm" RESC1608N 550,330 r90 top (schematic designator R12)
R13_A2.0 "1 kOhm" RESC1608N 480,150 r90 top (schematic designator R13)
R13_A2.1 "1 kOhm" RESC1608N 470,180 r90 top (schematic designator R13)
R13_A2.2 "1 kOhm" RESC1608N 480,210 r90 top (schematic designator R13)
R13_A2.3 "1 kOhm" RESC1608N 480,240 r90 top (schematic designator R13)
R13_A2.4 "1 kOhm" RESC1608N 480,270 r90 top (schematic designator R13)
R13_A2.5 "1 kOhm" RESC1608N 480,300 r90 top (schematic designator R13)
R13_A2.6 "1 kOhm" RESC1608N 480,330 r90 top (schematic designator R13)
R14_A2.0 "1 kOhm" RESC1608N 410,150 r90 top (schematic designator R14)
R14_A2.1 "1 kOhm" RESC1608N 400,180 r90 top (schematic designator R14)
R14_A2.2 "1 kOhm" RESC1608N 410,210 r90 top (schematic designator R14)
R14_A2.3 "1 kOhm" RESC1608N 410,240 r90 top (schematic designator R14)
R14_A2.4 "1 kOhm" RESC1608N 410,270 r90 top (schematic designator R14)
R14_A2.5 "1 kOhm" RESC1608N 410,300 r90 top (schematic designator R14)
R14_A2.6 "1 kOhm" RESC1608N 410,330 r90 top (schematic designator R14)
R15_A2.0 "1 kOhm" RESC1608N 590,150 r90 top (schematic designator R15)
R15_A2.1 "1 kOhm" RESC1608N 570,180 r90 top (schematic designator R15)
R15_A2.2 "1 kOhm" RESC1608N 590,210 r90 top (schematic designator R15)
R15_A2.3 "1 kOhm" RESC1608N 590,240 r90 top (schematic designator R15)
R15_A2.4 "1 kOhm" RESC1608N 590,270 r90 top (schematic designator R15)
R15_A2.5 "1 kOhm" RESC1608N 590,300 r90 top (schematic designator R15)
R15_A2.6 "1 kOhm" RESC1608N 590,330 r90 top (schematic designator R15)
R16_A2.0 "1 kOhm" RESC1608N 520,150 r90 top (schematic designator R16)
R16_A2.1 "1 kOhm" RESC1608N 500,180 r90 top (schematic designator R16)
R16_A2.2 "1 kOhm" RESC1608N 520,210 r90 top (schematic designator R16)
R16_A2.3 "1 kOhm" RESC1608N 520,240 r90 top (schematic designator R16)
R16_A2.4 "1 kOhm" RESC1608N 520,270 r90 top (schematic designator R16)
R16_A2.5 "1 kOhm" RESC1608N 520,300 r90 top (schematic designator R16)
R16_A2.6 "1 kOhm" RESC1608N 520,330 r90 top (schematic designator R16)
R17_A2.0 "1 kOhm" RESC1608N 440,150 r90 top (schematic designator R17)
R17_A2.1 "1 kOhm" RESC1608N 430,180 r90 top (schematic designator R17)
R17_A2.2 "1 kOhm" RESC1608N 440,210 r90 top (schematic designator R17)
R17_A2.3 "1 kOhm" RESC1608N 440,240 r90 top (schematic designator R17)
R17_A2.4 "1 kOhm" RESC1608N 440,270 r90 top (schematic designator R17)
R17_A2.5 "1 kOhm" RESC1608N 440,300 r90 top (schematic designator R17)
R17_A2.6 "1 kOhm" RESC1608N 440,330 r90 top (schematic designator R17)
R18_A2.0 "1 kOhm" RESC1608N 370,150 r90 top (schematic designator R18)
R18_A2.1 "1 kOhm" RESC1608N 360,180 r90 top (schematic designator R18)
R18_A2.2 "1 kOhm" RESC1608N 370,210 r90 top (schematic designator R18)
R18_A2.3 "1 kOhm" RESC1608N 370,240 r90 top (schematic designator R18)
R18_A2.4 "1 kOhm" RESC1608N 370,270 r90 top (schematic designator R18)
R18_A2.5 "1 kOhm" RESC1608N 370,300 r90 top (schematic designator R18)
R18_A2.6 "1 kOhm" RESC1608N 370,330 r90 top (schematic designator R18)
R19 "10 kOhm" RESC1608N 470,30 r90 top
R20 "10 kOhm" RESC1608N 290,30 r90 top
R21 "14 kOhm no pop" RESC1608N 270,30 r0 top
R22 "30.1 kOhm no pop" RESC1608N 240,30 r90 top
R23 "10 kOhm" RESC1608N 230,30 r90 top
R24 "14 kOhm no pop" RESC1608N 200,30 r90 top
R25 "50.1 kOhm no pop" RESC1608N 170,30 r90 top
R26 "47 kOhm no pop" RESC1608N 430,30 r90 top
R27 "47 kOhm no pop" RESC1608N 420,30 r90 top
R28 "47 kOhm" RESC1608N 210,70 r90 top
R29 "47 kOhm" RESC1608N 220,70 r90 top
R30 "0 Ohm no pop" RESC1608N 280,70 r90 top
R31 "47 kOhm" RESC1608N 270,70 r0 top
R32 "470 Ohm" RESC1608N 260,70 r90 top
R33 "470 Ohm" RESC1608N 240,70 r90 top
R34 "1 kOhm" RESC1608N 300,70 r90 top
R35 "4.7 kOhm" RESC1608N 270,70 r90 top
R36 "4.7 kOhm" RESC1608N 280,70 r90 top
R37 "470 Ohm" RESC1608N 230,110 r90 top
R38 "470 Ohm" RESC1608N 210,110 r90 top
R39 "100 kOhm no pop" RESC1608N 340,110 r90 top
R40 "10 kOhm" RESC1608N 340,110 r90 top
R41 "10 kOhm" RESC1608N 220,120 r0 top
R42 "1.5 kOhm" RESC1608N 320,110 r90 top
R43 "27 Ohm" RESC1608N 310,110 r90 top
R44 "27 Ohm" RESC1608N 290,110 r90 top
TP1_A2.0 "PLS-1" TPSW 260,150 r90 top (schematic designator TP1)
TP1_A2.1 "PLS-1" TPSW 250,180 r90 top (schematic designator TP1)
TP1_A2.2 "PLS-1" TPSW 260,210 r90 top (schematic designator TP1)
TP1_A2.3 "PLS-1" TPSW 260,240 r90 top (schematic designator TP1)
TP1_A2.4 "PLS-1" TPSW 260,270 r90 top (schematic designator TP1)
TP1_A2.5 "PLS-1" TPSW 260,300 r90 top (schematic designator TP1)
TP1_A2.6 "PLS-1" TPSW 260,330 r90 top (schematic designator TP1)
TP2 "PLS-1" TPSW 250,30 r0 top
TP3 "PLS-1" TPSW 180,30 r0 top
TP4 "PLS-1" TPSW 170,30 r0 top
TP5 "PLS-1" TPSW 450,30 r0 top
TP6 "PLS-1" TPSW 480,30 r0 top
TP7 "PLS-1" TPSW 410,30 r0 top
VD1 "KP-1608SURC" LED1608N 260,70 r0 top
VD2 "KP-1608SURC" LED1608N 250,70 r90 top
VD3 "KP-1608SURC" LED1608N 240,110 r90 top
VD4 "KP-1608SURC" LED1608N 220,110 r90 top
X1_A2.0 "PLD-16" PLD-16 650,150 r0 top (schematic designator X1)
X1_A2.1 "PLD-16" PLD-16 630,180 r0 top (schematic designator X1)
X1_A2.2 "PLD-16" PLD-16 650,210 r0 top (schematic designator X1)
X1_A2.3 "PLD-16" PLD-16 650,240 r0 top (schematic designator X1)
X1_A2.4 "PLD-16" PLD-16 650,270 r0 top (schematic designator X1)
X1_A2.5 "PLD-16" PLD-16 650,300 r0 top (schematic designator X1)
X1_A2.6 "PLD-16" PLD-16 650,330 r0 top (schematic designator X1)
X2 "PLS-5" PLS-5 470,30 r0 top
X3 "PLS-5" PLS-5 400,30 r0 top
X4 "PLD-20" PLD-20 170,70 r0 top
X5 "PLD-10" PLD-10 290,70 r0 top
X6 "PLS-5" PLS-5 180,110 r0 top
X7 "PLD-20" PLD-20 230,110 r0 top
X8 "PLD20" PLD-20 350,110 r0 top
X9 "USB Mini-B" USBMINIB 310,110 r0 top

## Footprints (in the part's own frame and the unit in brackets; to place one, negate y for a bottom-side part, rotate by r counter-clockwise, add the part's x,y. Pads: shape width x height; smd on the part's side, far side on the other; paste and mask are expansions set on the pad)
CAPC1608N [mm] "Chip Capacitor, Body 1.6x0.8mm, IPC Medium Density"
  rect 0.8x0.9 smd: 1(-0.7,0) 2(0.7,0)
  silkscreen extent -1.4,-0.35 -1.4,0.35, body extent -0.8,-0.4 0.8,0.4, height 0.3
HC-49/U3H [mm]
  round 1.4 hole 0.6: 1(0,0) 2(4.88,0)
  silkscreen extent -3.4,-2.3 8.3,2.3, body extent -3.09,-2.29 7.89,2.2, height 2.3
INDC2009M [mm] "Chip Inductor, Body 2.0x0.9mm, IPC Low Density"
  rect 1.2x1.3 smd: 1(-1.2,0) 2(1.2,0)
  silkscreen extent -0.2,-0.55 0.2,0.55, body extent -1,-0.6 1,0.6, height 0.95
KXO-V97 [mm] "QFN, 8-Leads, Body 5,00x7,00mm, Pitch 4,20mm/5,03mm, IPC Medium Density"
  rect 2x1.8 smd: 1(-2.2,2.54) 2(-2.2,-2.54) 3(2.2,-2.54) 4(2.2,2.54)
  silkscreen extent -3.07,3.83 -2.82,4.07, body extent -2.5,-3.5 2.5,3.5, height 1.8
LED1608N [mm] "Chip Resistor, Body 1.6x0.8mm, IPC Medium Density"
  rect 0.9x1 smd: 1(-0.85,0) 2(0.85,0)
  silkscreen extent -1.6,-0.4 0.2,0.4, body extent -0.8,-0.4 0.8,0.4, height 0.3
LQFP64 [mm] "TSQFP, 64-Leads, Body 10,00x10,00mm, Pitch 0,50mm, IPC Medium Density"
  oval 1.75x0.3 smd: 1(-5.575,3.75) 2(-5.575,3.25) 3(-5.575,2.75) 4(-5.575,2.25) 5(-5.575,1.75) 6(-5.575,1.25) 7(-5.575,0.75) 8(-5.575,0.25) 9(-5.575,-0.25) 10(-5.575,-0.75) 11(-5.575,-1.25) 12(-5.575,-1.75) 13(-5.575,-2.25) 14(-5.575,-2.75) 15(-5.575,-3.25) 16(-5.575,-3.75) 33(5.575,-3.75) 34(5.575,-3.25) 35(5.575,-2.75) 36(5.575,-2.25) 37(5.575,-1.75) 38(5.575,-1.25) 39(5.575,-0.75) 40(5.575,-0.25) 41(5.575,0.25) 42(5.575,0.75) 43(5.575,1.25) 44(5.575,1.75) 45(5.575,2.25) 46(5.575,2.75) 47(5.575,3.25) 48(5.575,3.75)
  oval 0.3x1.75 smd: 17(-3.75,-5.575) 18(-3.25,-5.575) 19(-2.75,-5.575) 20(-2.25,-5.575) 21(-1.75,-5.575) 22(-1.25,-5.575) 23(-0.75,-5.575) 24(-0.25,-5.575) 25(0.25,-5.575) 26(0.75,-5.575) 27(1.25,-5.575) 28(1.75,-5.575) 29(2.25,-5.575) 30(2.75,-5.575) 31(3.25,-5.575) 32(3.75,-5.575) 49(3.75,5.575) 50(3.25,5.575) 51(2.75,5.575) 52(2.25,5.575) 53(1.75,5.575) 54(1.25,5.575) 55(0.75,5.575) 56(0.25,5.575) 57(-0.25,5.575) 58(-0.75,5.575) 59(-1.25,5.575) 60(-1.75,5.575) 61(-2.25,5.575) 62(-2.75,5.575) 63(-3.25,5.575) 64(-3.75,5.575)
  silkscreen extent -5.7,-4.3 4.3,4.57, body extent -6,-6 6,6, height 1.6
PLD-10 [mm]
  rect 1.7x1.7 hole 1.1: 1(0,0)
  round 1.7 hole 1.1: 2(2.54,0) 3(0,-2.54) 4(2.54,-2.54) 5(0,-5.08) 6(2.54,-5.08) 7(0,-7.62) 8(2.54,-7.62) 9(0,-10.16) 10(2.54,-10.16)
  silkscreen extent -1,-11.5 3.5,1.27, body extent -1.2,-11.45 3.8,1.25, height 8.4
PLD-16 [mm]
  rect 1.7x1.7 hole 1.1: 1(0,0)
  round 1.7 hole 1.1: 2(2.54,0) 3(0,-2.54) 4(2.54,-2.54) 5(0,-5.08) 6(2.54,-5.08) 7(0,-7.62) 8(2.54,-7.62) 9(0,-10.16) 10(2.54,-10.16) 11(0,-12.7) 12(2.54,-12.7) 13(0,-15.24) 14(2.54,-15.24) 15(0,-17.78) 16(2.54,-17.78)
  silkscreen extent -1.2,-19.05 3.8,1.27, body extent -1.2,-18.97 3.8,1.35, height 8.4
PLD-20 [mm]
  rect 1.7x1.7 hole 1.1: 1(0,0)
  round 1.7 hole 1.1: 2(2.54,0) 3(0,-2.54) 4(2.54,-2.54) 5(0,-5.08) 6(2.54,-5.08) 7(0,-7.62) 8(2.54,-7.62) 9(0,-10.16) 10(2.54,-10.16) 11(0,-12.7) 12(2.54,-12.7) 13(0,-15.24) 14(2.54,-15.24) 15(0,-17.78) 16(2.54,-17.78) 17(0,-20.32) 18(2.54,-20.32) 19(0,-22.86) 20(2.54,-22.86)
  silkscreen extent -1,-24.5 3.5,1.27, body extent -1.2,-24.2 3.8,1.2, height 8.4
PLS-5 [mm]
  rect 1.7x1.7 hole 1.1: 1(0,0)
  round 1.7 hole 1.1: 2(0,-2.54) 3(0,-5.08) 4(0,-7.62) 5(0,-10.16)
  silkscreen extent -1,-11.5 1.2,1.27
RESC1608N [mm] "Chip Resistor, Body 1.6x0.8mm, IPC Medium Density"
  rect 0.9x1 smd: 1(-0.85,0) 2(0.85,0)
  silkscreen extent -0.2,-0.4 0.2,0.4, body extent -0.8,-0.4 0.8,0.4, height 0.3
SO8 [mm] "Small Outline; 8 Leads; Body Width 3.9 mm; Pitch 1.27 mm"
  rect 0.72x1.78 smd: 1(-1.905,-2.34) 2(-0.635,-2.34) 3(0.635,-2.34) 4(1.905,-2.34) 5(1.905,2.34) 6(0.635,2.34) 7(-0.635,2.34) 8(-1.905,2.34)
  silkscreen extent -2.88,-2.72 2.5,1.1, body extent -2.44,-3.07 2.45,3.07, height 1.78
SOP65P780X200-20N [mm] "SOP, 20-Leads, Body 7.5x5.6mm (max), Pitch 0.65mm, IPC Medium Density"
  oval 2.1x0.45 smd: 1(-3.45,2.925) 2(-3.45,2.275) 3(-3.45,1.625) 4(-3.45,0.975) 5(-3.45,0.325) 6(-3.45,-0.325) 7(-3.45,-0.975) 8(-3.45,-1.625) 9(-3.45,-2.275) 10(-3.45,-2.925) 11(3.45,-2.925) 12(3.45,-2.275) 13(3.45,-1.625) 14(3.45,-0.975) 15(3.45,-0.325) 16(3.45,0.325) 17(3.45,0.975) 18(3.45,1.625) 19(3.45,2.275) 20(3.45,2.925)
  silkscreen extent -3.57,-3.75 2,3.82, body extent -2.8,-3.75 2.8,3.75, height 2
SOT127P706X180-6N [mm] "SOT223, 6-Leads, Body 6.6x7.3mm (max), Pitch 1.27mm, IPC Medium Density"
  rect 2.2x0.65 smd: 1(-3.1,2.54) 2(-3.1,1.27) 3(-3.1,0) 4(-3.1,-1.27) 5(-3.1,-2.54)
  rect 2.2x3.5 smd: 6(3.1,0)
  silkscreen extent -3.22,-3.27 1.5,3.54, body extent -1.77,-3.27 1.78,3.27, height 1.8
SOT230P700X180-4N [mm] "SOT223, 4-Leads, Body 6,50x7,00mm (avg), Pitch 2,30mm, IPC Medium Density"
  rect 2.15x1 smd: 1(-2.925,2.3) 2(-2.925,0) 3(-2.925,-2.3)
  rect 2.15x3.25 smd: 4(2.925,0)
  silkscreen extent -3.05,-3.35 1.55,3.47, body extent -1.85,-3.35 1.85,3.35, height 1.8
TC7343-2917 [mm] "Capacitor, SM Tantalum; Body 7.3 x 4.3 mm (LxW typ)"
  rect 2.6x2.4 smd: 1(-3.2,0) 2(3.2,0)
  silkscreen extent -4.57,-2.3 3.8,2.42, body extent -3.65,-2.15 3.65,2.15, height 2.81
TPSW [mm]
  round 1.6 hole 1.1: 1(0,0)
  silkscreen extent -0.95,-0.92 0.95,0.92
TQFP100_A-120_L [mm] "Thin QFP, 100-Leads, Body 14x14mm, Pitch 0.5mm, IPC High Density"
  oval 1.55x0.25 smd: 1(-7.525,6) 2(-7.525,5.5) 3(-7.525,5) 4(-7.525,4.5) 5(-7.525,4) 6(-7.525,3.5) 7(-7.525,3) 8(-7.525,2.5) 9(-7.525,2) 10(-7.525,1.5) 11(-7.525,1) 12(-7.525,0.5) 13(-7.525,0) 14(-7.525,-0.5) 15(-7.525,-1) 16(-7.525,-1.5) 17(-7.525,-2) 18(-7.525,-2.5) 19(-7.525,-3) 20(-7.525,-3.5) 21(-7.525,-4) 22(-7.525,-4.5) 23(-7.525,-5) 24(-7.525,-5.5) 25(-7.525,-6) 51(7.525,-6) 52(7.525,-5.5) 53(7.525,-5) 54(7.525,-4.5) 55(7.525,-4) 56(7.525,-3.5) 57(7.525,-3) 58(7.525,-2.5) 59(7.525,-2) 60(7.525,-1.5) 61(7.525,-1) 62(7.525,-0.5) 63(7.525,0) 64(7.525,0.5) 65(7.525,1) 66(7.525,1.5) 67(7.525,2) 68(7.525,2.5) 69(7.525,3) 70(7.525,3.5) 71(7.525,4) 72(7.525,4.5) 73(7.525,5) 74(7.525,5.5) 75(7.525,6)
  oval 0.25x1.55 smd: 26(-6,-7.525) 27(-5.5,-7.525) 28(-5,-7.525) 29(-4.5,-7.525) 30(-4,-7.525) 31(-3.5,-7.525) 32(-3,-7.525) 33(-2.5,-7.525) 34(-2,-7.525) 35(-1.5,-7.525) 36(-1,-7.525) 37(-0.5,-7.525) 38(0,-7.525) 39(0.5,-7.525) 40(1,-7.525) 41(1.5,-7.525) 42(2,-7.525) 43(2.5,-7.525) 44(3,-7.525) 45(3.5,-7.525) 46(4,-7.525) 47(4.5,-7.525) 48(5,-7.525) 49(5.5,-7.525) 50(6,-7.525) 76(6,7.525) 77(5.5,7.525) 78(5,7.525) 79(4.5,7.525) 80(4,7.525) 81(3.5,7.525) 82(3,7.525) 83(2.5,7.525) 84(2,7.525) 85(1.5,7.525) 86(1,7.525) 87(0.5,7.525) 88(0,7.525) 89(-0.5,7.525) 90(-1,7.525) 91(-1.5,7.525) 92(-2,7.525) 93(-2.5,7.525) 94(-3,7.525) 95(-3.5,7.525) 96(-4,7.525) 97(-4.5,7.525) 98(-5,7.525) 99(-5.5,7.525) 100(-6,7.525)
  silkscreen extent -7.65,-6.35 6.35,6.8, body extent -7,-7 7,7, height 1.2
TSOP65P640X120-14N [mm] "TSOP, 14-Leads, Body 5,00x4,40mm, Pitch 0,65mm, IPC Medium Density"
  oval 1.55x0.35 smd: 1(-2.8,1.95) 2(-2.8,1.3) 3(-2.8,0.65) 4(-2.8,0) 5(-2.8,-0.65) 6(-2.8,-1.3) 7(-2.8,-1.95) 8(2.8,-1.95) 9(2.8,-1.3) 10(2.8,-0.65) 11(2.8,0) 12(2.8,0.65) 13(2.8,1.3) 14(2.8,1.95)
  silkscreen extent -2.92,-2.55 1.85,2.8, body extent -2.25,-2.55 2.25,2.55, height 1.2
TSQFP50P1200X1200X160-64N [mm] "TSQFP, 64-Leads, Body 10,00x10,00mm, Pitch 0,50mm, IPC Medium Density"
  oval 1.45x0.3 smd: 1(-5.725,3.75) 2(-5.725,3.25) 3(-5.725,2.75) 4(-5.725,2.25) 5(-5.725,1.75) 6(-5.725,1.25) 7(-5.725,0.75) 8(-5.725,0.25) 9(-5.725,-0.25) 10(-5.725,-0.75) 11(-5.725,-1.25) 12(-5.725,-1.75) 13(-5.725,-2.25) 14(-5.725,-2.75) 15(-5.725,-3.25) 16(-5.725,-3.75) 33(5.725,-3.75) 34(5.725,-3.25) 35(5.725,-2.75) 36(5.725,-2.25) 37(5.725,-1.75) 38(5.725,-1.25) 39(5.725,-0.75) 40(5.725,-0.25) 41(5.725,0.25) 42(5.725,0.75) 43(5.725,1.25) 44(5.725,1.75) 45(5.725,2.25) 46(5.725,2.75) 47(5.725,3.25) 48(5.725,3.75)
  oval 0.3x1.45 smd: 17(-3.75,-5.725) 18(-3.25,-5.725) 19(-2.75,-5.725) 20(-2.25,-5.725) 21(-1.75,-5.725) 22(-1.25,-5.725) 23(-0.75,-5.725) 24(-0.25,-5.725) 25(0.25,-5.725) 26(0.75,-5.725) 27(1.25,-5.725) 28(1.75,-5.725) 29(2.25,-5.725) 30(2.75,-5.725) 31(3.25,-5.725) 32(3.75,-5.725) 49(3.75,5.725) 50(3.25,5.725) 51(2.75,5.725) 52(2.25,5.725) 53(1.75,5.725) 54(1.25,5.725) 55(0.75,5.725) 56(0.25,5.725) 57(-0.25,5.725) 58(-0.75,5.725) 59(-1.25,5.725) 60(-1.75,5.725) 61(-2.25,5.725) 62(-2.75,5.725) 63(-3.25,5.725) 64(-3.75,5.725)
  silkscreen extent -5.85,-4.6 4.6,4.6, body extent -5,-5 5,5, height 1.6
USBMINIB [mm] "Molex 548191572"
  oval 2.25x0.5 smd: 1(0,1.6) 2(0,0.8) 3(0,0) 4(0,-0.8) 5(0,-1.6)
  rect 4x2.05 smd: 6(-4.25,-4.925) 6(-4.25,4.925)
  rect 3.5x2.05 smd: 6(0,-4.925) 6(0,4.925)
  silkscreen extent -7.3,-6.1 2.2,6.2, body extent -8.4,-4.95 0.6,4.95, height 4.05